# Altium PCB PCB1(26Pin).PcbDoc
Units mil, origin at the board's own origin, x right, y up, seen from the top; angles counter-clockwise.
Board outline 2913.39 x 984.25 mil, 2 copper layers (Top Layer, Bottom Layer); 10 components, 10 nets, 61 pads, 0 vias.
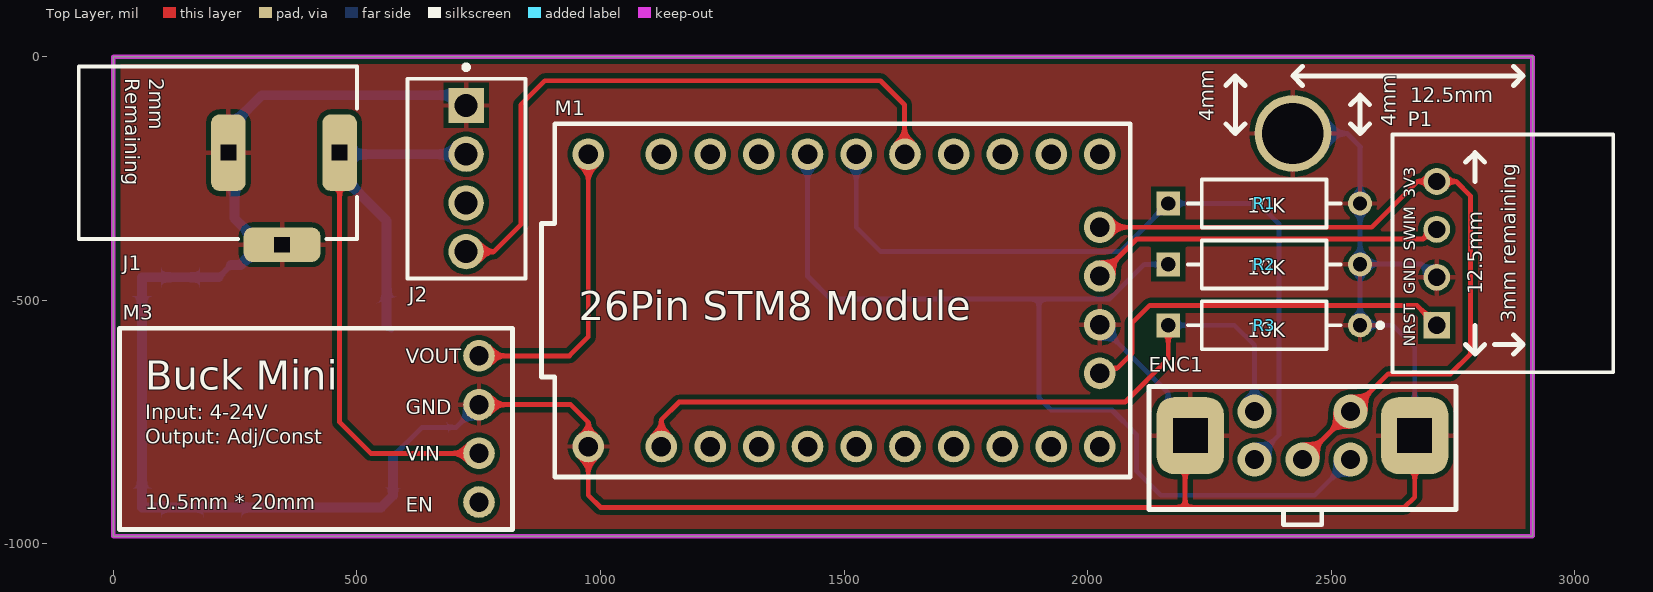
[diagram p0: Top Layer view]
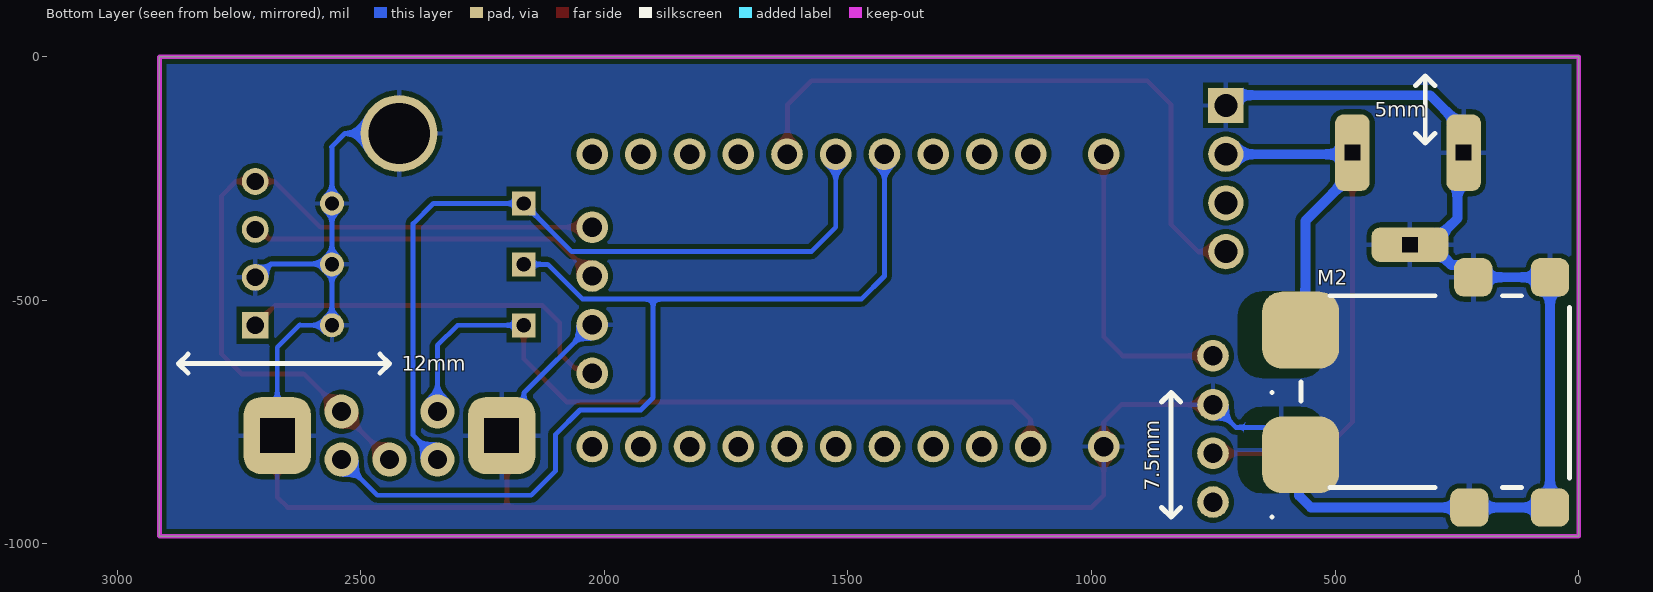
[diagram p1: Bottom Layer view, seen from below]
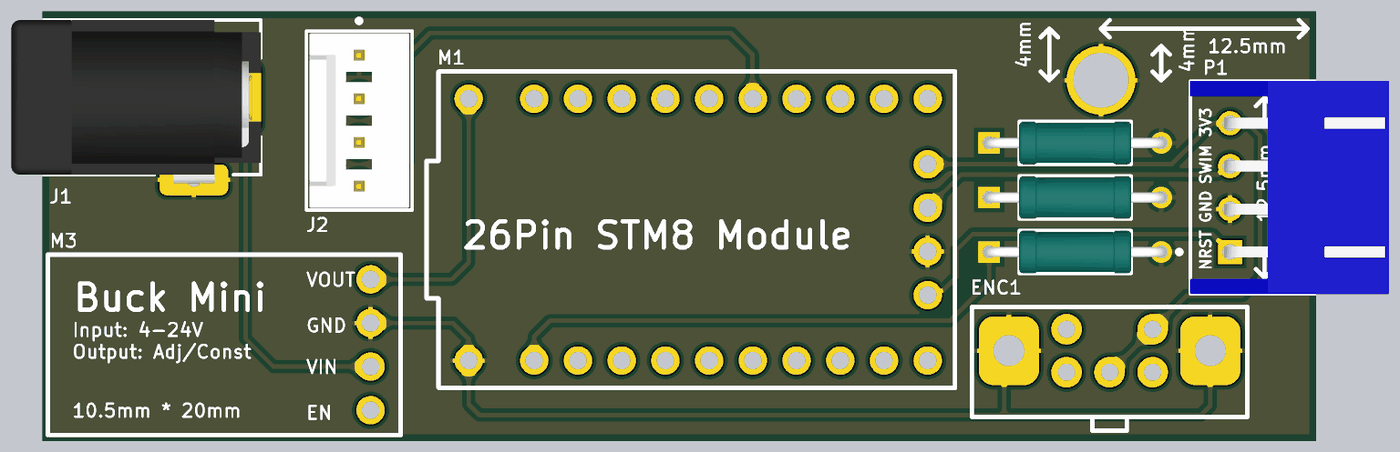
[diagram p2: 3D render of the assembled board from above, using the file's embedded part models]

## Layer stack, top to bottom
Top Solder: solder mask 0.4, Solder Resist, Dk 3.5
Top Layer: signal copper 1.4
Dielectric 1: dielectric 12.6, FR-4, Dk 4.8
Bottom Layer: signal copper 1.4
Bottom Solder: solder mask 0.4, Solder Resist, Dk 3.5

## Board outline
0,-984.25 0,0 2913.39,0 2913.39,-984.25

## Design rules (kind name [scope] priority, off if disabled: settings)
Clearance [All] p1: gap=10 ignorepadtopadclearanceinfootprint=FALSE
HoleSize [All] p1: absolutevalues=TRUE maxlimit=250 minlimit=1 maxpercent=80.000 minpercent=20.000
PolygonConnect [All] p1: connectstyle=Relief reliefconductorwidth=10 reliefentries=4 polygonreliefangle="90 Angle" airgapwidth=10
RoutingVias [All] p1: holewidth=28 width=50 viastyle="Through Hole" minholewidth=28 minwidth=50 maxholewidth=28 maxwidth=50
SilkToSolderMaskClearance [IsPad] p1: minsilkscreentomaskgap=5 clearancetoexposedcopper=TRUE
SolderMaskExpansion [All] p1: expansion=4 istentingtop=FALSE
Width [All] p1: maxlimit=20 minlimit=10 preferedwidth=10 minimp=50.000000 maximp=50.000000 favimp=50.000000
28 further rules are at their usual default settings.

## Components (designator, comment, footprint, x,y, rotation, side; value= is the part's Value field where it differs from the comment)
ENC1 "PEC11R-4220K-S0024" LIBRARYSOURCE=Vault 2122.52,-673.35 r0 top
J1 "694108301002" 694108301002 214.57,-196.85 r270 top
J2 "22-29-2041" FP-22-29-2041-MFG 725,-250 r90 top
M1 "STM8S103F2/F3 Module 26Pin" "STM8FxP6 Module 26Pin" 825,-100 r0 top
M2 "PD Decoy" "PD DECOY" 18.86,-884.25 r0 bottom
M3 "12V BUCK to 5V" "Buck Mini" 10.64,-558.96 r0 top
P1 "S4B-XH-A(LF)(SN)" JST-S4B-XH-A(LF)(SN)_V 2716.54,-403.54 r90 top
R1 "10K" FP-MRS25-MFG 2362.2,-301.18 r0 top
R2 "10K" FP-MRS25-MFG 2362.2,-426.18 r0 top
R3 "10K" FP-MRS25-MFG 2362.2,-551.18 r0 top

## Footprints (in the part's own frame and the unit in brackets; to place one, negate y for a bottom-side part, rotate by r counter-clockwise, add the part's x,y. Pads: shape width x height; smd on the part's side, far side on the other; paste and mask are expansions set on the pad)
694108301002 [mm] "DC Power Jack Right Angled(6.4)"
  rrect50% 4x1.8 hole 0.8 square: 1(0,6.35) 2(0,0.55)
  rrect50% 1.8x4 hole 0.8 square: 3(4.8,3.35)
  silkscreen extent -4.5,-7.25 4.5,7.25, body extent -4.5,-7.25 5,7.25, height 10.75
"Buck Mini" [mil] "输入：4-24V / 输出：可调或恒定（0.8-17V，通过短接配置） / 体积大小：10.5mm*20mm"
  round 65 hole 40: 1(740,-55) 2(740,-155) 3(740,-255) 4(740,-355)
  silkscreen extent 2,-412 809,2
FP-22-29-2041-MFG [mm]
  rect 1.84x1.84 hole 1.19 paste-2539.97 mask+0: 1(3.81,0.02)
  round 1.84 hole 1.19 paste-2539.97 mask+0: 2(1.27,0.02) 3(-1.27,0.02) 4(-3.81,0.02)
  silkscreen extent -5.21,-3.08 5.93,3.08, body extent -5.31,-3.18 5.31,3.18, height 0.25
FP-MRS25-MFG [mm]
  rect 1.25x1.25 hole 0.75 paste-2539.97 mask+0: 1(-5,0)
  round 1.25 hole 0.75 paste-2539.97 mask+0: 2(5,0)
  silkscreen extent -3.98,-1.25 3.98,1.25, body extent -5.72,-1.35 5.72,1.35, height 0.25
JST-S4B-XH-A(LF)(SN)_V [mm] "Header, 4-Leads, Body 12.4x11.5mm, Pitch 2.5mm"
  rect 1.4x1.4 hole 0.9: 1(-3.75,0)
  round 1.4 hole 0.9: 2(-1.25,0) 3(1.25,0) 4(3.75,0)
  silkscreen extent -6.2,-9.2 6.2,3.07, body extent -6.2,-9.2 6.2,2.3, height 6.15
LIBRARYSOURCE=Vault [mil]
  rrect50% 137.8x157.48 hole 70.87 square: 3(548.74,-104.21) 4(88.11,-104.21)
  round 70 hole 39.37: A(220,-153.43) B(416.85,-153.43) C(318.43,-153.43) D(220,-55) E(416.85,-55)
  silkscreen extent 3,-287 633,-4
"PD DECOY" [mm] "Pin1: GND / Pin2: VOUT"
  rrect50% 2x2 smd: 1(1.021,-10.96) 1(1.021,1.04) 1(5.021,-10.96) 1(5.221,1.04)
  rrect50% 4x4 smd: 1(14.021,-1.71) 2(14.021,-8.21)
  silkscreen extent 0,-10 14,0
"STM8FxP6 Module 26Pin" [mil]
  round 65 hole 40: 1(150,-100) 2(300,-100) 3(400,-100) 4(500,-100) 5(600,-100) 6(700,-100) 7(800,-100) 8(900,-100) 9(1000,-100) 10(1100,-100) 11(1200,-100) 12(1200,-250) 13(1200,-350) 14(1200,-450) 15(1200,-550) 16(1200,-700) 17(1100,-700) 18(1000,-700) 19(900,-700) 20(800,-700) 21(700,-700) 22(600,-700) 23(500,-700) 24(400,-700) 25(300,-700) 26(150,-700)
  silkscreen extent 54,-763 1263,-38

## Part data
ENC1: library part CMP-07421-000070-1, "ROTARY ENCODER INCREMENTAL 24PPR", Max Operating Temperature=70°C, Min Operating Temperature=-30°C, Nominal Supply Voltage (DC)=5V, Package Quantity=75, Actuator Type=Shaft, Built in Switch=Yes, Detent=Yes, Encoder Type=Incremental, Height=13.4mm, Hole Diameter=1mm, Length=26.5mm, Mount="Through Hole", Number of Channels=2, Number of Pins=5, Orientation=Vertical, Output Type=Quadrature, Packaging=Bulk, Pulses per Revolution=24, REACH SVHC="No SVHC", RoHS Compliant=Yes, Series=PEC11R, Termination="PC Pin", Width=12.5mm
J1: library part CMP-1502-00190-3, Color=Black, Current Rating=5A, Flammability Rating="UL94 V-0", Insulation Resistance=100MΩ, Max Operating Temperature=85°C, Min Operating Temperature=-40°C, Operating Supply Voltage=24V, Voltage Rating (DC)=20V, Connector Type=Power, Contact Gender=Female, Contact Material="Gold, Tin", Contact Plating=Tin, Gender=Male, Height=11mm, Housing Material=Polyamide, Mount="Through Hole", NexarPartId=52676102, Number of Contacts=3, Packaging=Bulk, REACH SVHC=Unknown, RoHS=Compliant, Shielding=Unshielded, Termination="Through Hole", Voltage Rating=24V
J2: library part CMP-04776-000366-1, "CONN HEADER VERT 4POS 2.54MM", Color=Natural, Contact Resistance=10mR, Current Rating=4A, Flammability Rating="UL94 V-0", Housing Color=White, Insulation Resistance=50GR, Max Operating Temperature=75°C, Min Operating Temperature=0°C, Package Quantity=1500, Voltage Rating=250V, Contact Gender=Male, Contact Material=Brass, Contact Mating Length=0.295inch, Contact Plating=Gold, Contact Type="Male Pin", Depth=5.8mm, Fastening Type=Friction, Gender=Male, Glow Wire Compliant=Non-compliant, Halogen Free="Low Halogen", Height=11.7mm, Housing Material=Nylon, Lead Free="Lead Free", Length=10.16mm, Max Current Rating=4A, Mount="Through Hole", Number of Circuits=4, Number of Contacts=4, Number of Lines=1, Number of Poles=4, Number of Positions=4, Number of Rows=1, Orientation=Straight, Packaging=Bulk, Pitch=2.54mm, Radiation Hardening=No, RoHS Compliant=Yes, Series="KK® 6410", Termination=Solder, Voltage Rating (DC)=250V
M1: library part "STM8S103F2/F3 Module"
M3: library part BUCK
P1: library part CMP-1755-00007-1, "Male Header, Pitch 2.5 mm, 1 x 4 Position, Height 6.1 mm, Tail Length 3.4 mm, -25 to 85 degC, RoHS, Bulk", ComponentLink1Description="Manufacturer URL", ComponentLink1URL=http://www.jst.com/home2.html, ComponentLink2Description=Datasheet, ComponentLink2URL=http://www.jst-mfg.com/product/pdf/eng/eXH.pdf, DatasheetVersion=May-16, PackageDescription="Male Header, Pitch 2.5 mm, 1 x 4 Position, Height 6.1 mm, Tail Length 3.4 mm", PackageReference=S4B-XH-A(LF)(SN)
R1 R2 R3: library part CMP-02408-000051-1, "RES 1K OHM 0.6W 1% AXIAL", Case/Package=Axial, Max Operating Temperature=155°C, Max Power Dissipation=600mW, Min Operating Temperature=-55°C, Package Quantity=5000, Resistance=1kR, Resistance Tolerance=1%, Resistor Type="Metal Film", Temperature Coefficient=50ppm/°C, Voltage Rating=350V, Construction=Cylindrical, Contact Plating=Tin, Diameter=2.5mm, Lead Diameter=0.6mm, Lead Free="Lead Free", Length=6.5mm, Military Standard=Not, Mount="Through Hole", Number of Pins=2, Number of Terminations=2, Packaging="Tape and Reel", Power Rating=600mW, Radiation Hardening=No, RoHS Compliant=Yes, Series=MRS25, Technology="THIN FILM", Termination=Axial, Tolerance=1%, Voltage Rating (DC)=350V, Weight=0.00776oz, Width=2.5mm

## Free pads (board coordinates)
  round 157.48 hole 125.98: 16(2421.26,-157.48)

## Nets (pads, with @x,y where several pads share a name; then routed paths per layer and width w, separated by ;. In a path a pad name is that pad's centre, name@x,y a point inside that pad or via, vN(x,y) a via of type N, cw(c..) or ccw(c..) an arc to the next point about the centre after c; other vN are vias at no path point)
+3.3: ENC1.C ENC1.E M1.12 P1.4 | length 1570.6
  Top Layer w10: M1.12 2583.07,-350 2677.17,-255.91 2755.91,-255.91 2785.43,-285.43 2785.43,-610.24 2744.76,-650.91 2616.81,-650.91 ENC1.E ENC1.C
+5: M1.1 M3.1 | length 615.5
  Top Layer w10: M3.1 936.04,-613.96 975,-575 M1.1
+12: J1.1 J2.2 M2.2 M3.3 | length 1534.9
  Top Layer w10: J1.1 464.57,-750 528.53,-813.96 M3.3
  Bottom Layer w10: J1.1@464.57,-240.16 J1.1 J1.1@467.72,-200 ; M2.2@561.02,-551.18 M2.2
  Bottom Layer w20: J1.1@464.57,-240.16 561.02,-336.61 M2.2@561.02,-551.18 ; J1.1@467.72,-200 J2.2
EC11_CHA: ENC1.A M1.6 R1.1 | length 1601.2
  Bottom Layer w10: M1.6 1525,-350 1575,-400 2066.54,-400 R1.1 2351.18,-301.18 2392.52,-342.52 2392.52,-776.77 ENC1.A
EC11_CHB: ENC1.B M1.5 R2.1 | length 2038.5
  Bottom Layer w10: M1.5 1425,-450 1472.5,-497.5 1900,-497.5 ; R2.1 2115.99,-426.18 2044.68,-497.5 1900,-497.5 ; ENC1.B 2466.14,-900 2150,-900 2100,-850 2100,-775 2050,-725 1925,-725 1900,-700 1900,-497.5
EC11_Push: ENC1.D M1.25 R3.1 | length 1546.1
  Top Layer w10: M1.25 1125,-745.08 1161.42,-708.66 2076.77,-708.66 2165.35,-620.08 R3.1
  Bottom Layer w10: R3.1 2301.18,-551.18 2342.52,-592.52 ENC1.D
GND: ENC1.3 ENC1.4 J1.2 J1.3 J2.1 M1.14 M1.26 M2.1 M3.2 P1.2 pad.16 R1.2 R2.2 R3.2 | length 6078.8
  Top Layer w10: M3.2 938.96,-713.96 975,-750 M1.26 975,-900 1000,-925 2200,-925 ; ENC1.4 2200,-788.19 2200,-925 ; ENC1.3 2671.26,-903.74 2650,-925 2200,-925
  Bottom Layer w10: M2.1@216.54,-452.76 M2.1@241.84,-427.45 ; J1.2@236.22,-147.64 J1.2 J1.2@248.94,-209.57 ; J1.3@303.15,-385.83 J1.3 ; M2.1@574.17,-820.24 633.78,-760.62 703.98,-760.62 M3.2 ; M1.14 2164.91,-689.91 2164.91,-731.84 ENC1.4 ; pad.16 2532.48,-157.48 2560.53,-185.53 2559.06,-187.01 R1.2 R2.2 R3.2 2623.82,-551.18 2625,-550 2671.26,-596.26 ENC1.3 ; R2.2@2571.85,-425 2684.1,-425 2711.86,-452.76 P1.2
  Bottom Layer w20: M2.1@216.54,-452.76 59.06,-452.76 59.06,-925.2 224.41,-925.2 549.8,-925.2 574.17,-900.83 M2.1@574.17,-820.24 ; J1.2@236.22,-147.64 305.12,-78.74 702.95,-78.74 J2.1 ; M2.1@241.84,-427.45 261.53,-427.45 303.15,-385.83 248.94,-331.61 J1.2@248.94,-209.57
NRST: M1.15 P1.1 | length 802.7
  Top Layer w10: M1.15 2035.52,-639.48 2060.52,-639.48 2091.43,-608.57 2091.43,-546.37 2127.4,-510.39 2675.75,-510.39 P1.1
PWM: J2.4 M1.7 | length 1311.6
  Top Layer w10: J2.4 781.1,-400 836.61,-344.49 836.61,-98.43 885.83,-49.21 1574.8,-49.21 1624.02,-98.43 1624.02,-199.02 M1.7
SWIM: M1.13 P1.3 | length 731.2
  Top Layer w10: M1.13 2100.98,-374.02 2688.12,-374.02 2707.8,-354.33 P1.3
pads on no net: J2.3 M1.2 M1.3 M1.4 M1.8 M1.9 M1.10 M1.11 M1.16 M1.17 M1.18 M1.19 M1.20 M1.21 M1.22 M1.23 M1.24 M3.4

## Polygon pours and split planes (outlines as drawn)
GND on Top Layer "GND_L01_P000" (solid, remove dead copper, pour order 0): 0,0 2913.39,0 2913.39,-984.25 0,-984.25
GND on Bottom Layer "GND_L02_P001" (solid, remove dead copper, pour order 1): 0,0 2913.39,0 2913.39,-984.25 0,-984.25

## Keep-outs
Keep-Out Layer:
  the board outline again, w10

## Silkscreen, mask and mechanical layers (free items; w line width, h text height)
Top Overlay:
  lines w10: 2283.46,-137.8 2303.15,-157.48 ; 2283.46,-59.06 2303.15,-39.37 ; 2322.83,-137.8 2303.15,-157.48 ; 2322.83,-59.06 2303.15,-39.37 ; 2440.94,-59.06 2421.26,-39.37 ; 2440.94,-19.68 2421.26,-39.37 ; 2539.37,-137.8 2559.06,-157.48 ; 2539.37,-98.43 2559.06,-78.74 ; 2578.74,-137.8 2559.06,-157.48 ; 2578.74,-98.43 2559.06,-78.74 ; 2775.59,-590.55 2795.28,-610.24 ; 2775.59,-216.54 2795.28,-196.85 ; 2795.28,-551.18 2795.28,-610.24 ; 2795.28,-255.91 2795.28,-196.85 ; 2814.96,-590.55 2795.28,-610.24 ; 2814.96,-216.54 2795.28,-196.85 ; 2834.65,-590.55 2893.7,-590.55 ; 2874.02,-610.24 2893.7,-590.55 ; 2874.02,-570.87 2893.7,-590.55 ; 2874.02,-59.06 2893.7,-39.37 ; 2874.02,-19.68 2893.7,-39.37 ; 2303.15,-157.48 2303.15,-157.48 ; 2303.15,-157.48 2303.15,-39.37 ; 2303.15,-39.37 2303.15,-39.37 ; 2303.15,-39.37 2303.15,-39.37 ; 2421.26,-39.37 2893.7,-39.37 ; 2421.26,-39.37 2421.26,-39.37 ; 2421.26,-39.37 2421.26,-39.37 ; 2421.26,-39.37 2421.26,-39.37 ; 2559.06,-157.48 2559.06,-157.48 ; 2559.06,-157.48 2559.06,-78.74 ; 2559.06,-78.74 2559.06,-78.74 ; 2893.7,-590.55 2893.7,-590.55 ; 2893.7,-39.37 2893.7,-39.37
  text "Remaining" at 24.84,-44.37 h30 r270
  text "2mm" at 73.9,-44.37 h30 r270
  text "12.5mm" at 2662.48,-93.43 h30
  text "4mm" at 2258.78,-132.8 h30 r90
  text "4mm" at 2632.8,-142.64 h30 r90
  text "3V3" at 2672.17,-290.28 h24 r90
  text "10K" at 2327.83,-319.8 h30
  text "SWIM" at 2672.17,-398.54 h24 r90
  text "10K" at 2327.83,-447.76 h30
  text "GND" at 2672.17,-487.13 h24 r90
  text "12.5mm" at 2809.96,-487.13 h30 r90
  text "26Pin STM8 Module" at 954.88,-541.18 h60
  text "3mm remaining" at 2878.7,-546.18 h30 r90
  text "10K" at 2327.83,-575.71 h30
  text "NRST" at 2672.17,-595.39 h24 r90
Bottom Overlay:
  lines w10: 295.28,-157.48 314.96,-177.17 ; 295.28,-59.06 314.96,-39.37 ; 334.65,-157.48 314.96,-177.17 ; 334.65,-59.06 314.96,-39.37 ; 816.93,-925.2 836.61,-944.88 ; 816.93,-708.66 836.61,-688.98 ; 856.3,-925.2 836.61,-944.88 ; 856.3,-708.66 836.61,-688.98 ; 2460.63,-649.61 2440.94,-629.92 ; 2460.63,-610.24 2440.94,-629.92 ; 2854.33,-649.61 2874.02,-629.92 ; 2854.33,-610.24 2874.02,-629.92 ; 314.96,-177.17 314.96,-39.37 ; 836.61,-944.88 836.61,-688.98 ; 2440.94,-629.92 2440.94,-629.92 ; 2440.94,-629.92 2874.02,-629.92 ; 2874.02,-629.92 2874.02,-629.92 ; 629.92,-944.88 629.92,-944.88 ; 629.92,-688.98 629.92,-688.98
  text "5mm" at 418.23,-122.95 h30
  text "12mm" at 2416.26,-644.61 h30
  text "7.5mm" at 861.3,-890.67 h30 r270
Mechanical 1:
  the board outline again, w10

## Text inside footprints (layer, text, board x,y; h text height)
M3: Top Overlay "EN" at 600.64,-933.96 h30; Top Overlay "VIN" at 600.64,-828.96 h30; Top Overlay "GND" at 600.64,-733.96 h30; Top Overlay "VOUT" at 600.64,-628.96 h30; Top Overlay "Buck Mini" at 65.64,-683.96 h60; Top Overlay "Input: 4-24V" at 65.64,-743.96 h30; Top Overlay "Output: Adj/Const" at 65.64,-793.96 h30; Top Overlay "10.5mm * 20mm" at 65.64,-928.96 h30